# Altium PCB Nokia LCD.PcbDoc
Units mm, origin at the board's own origin, x right, y up, seen from the top; angles counter-clockwise.
Board outline 37.97 x 55.88 mm, 2 copper layers (Top Layer, Bottom Layer); 2 components, 7 nets, 19 pads, 0 vias.
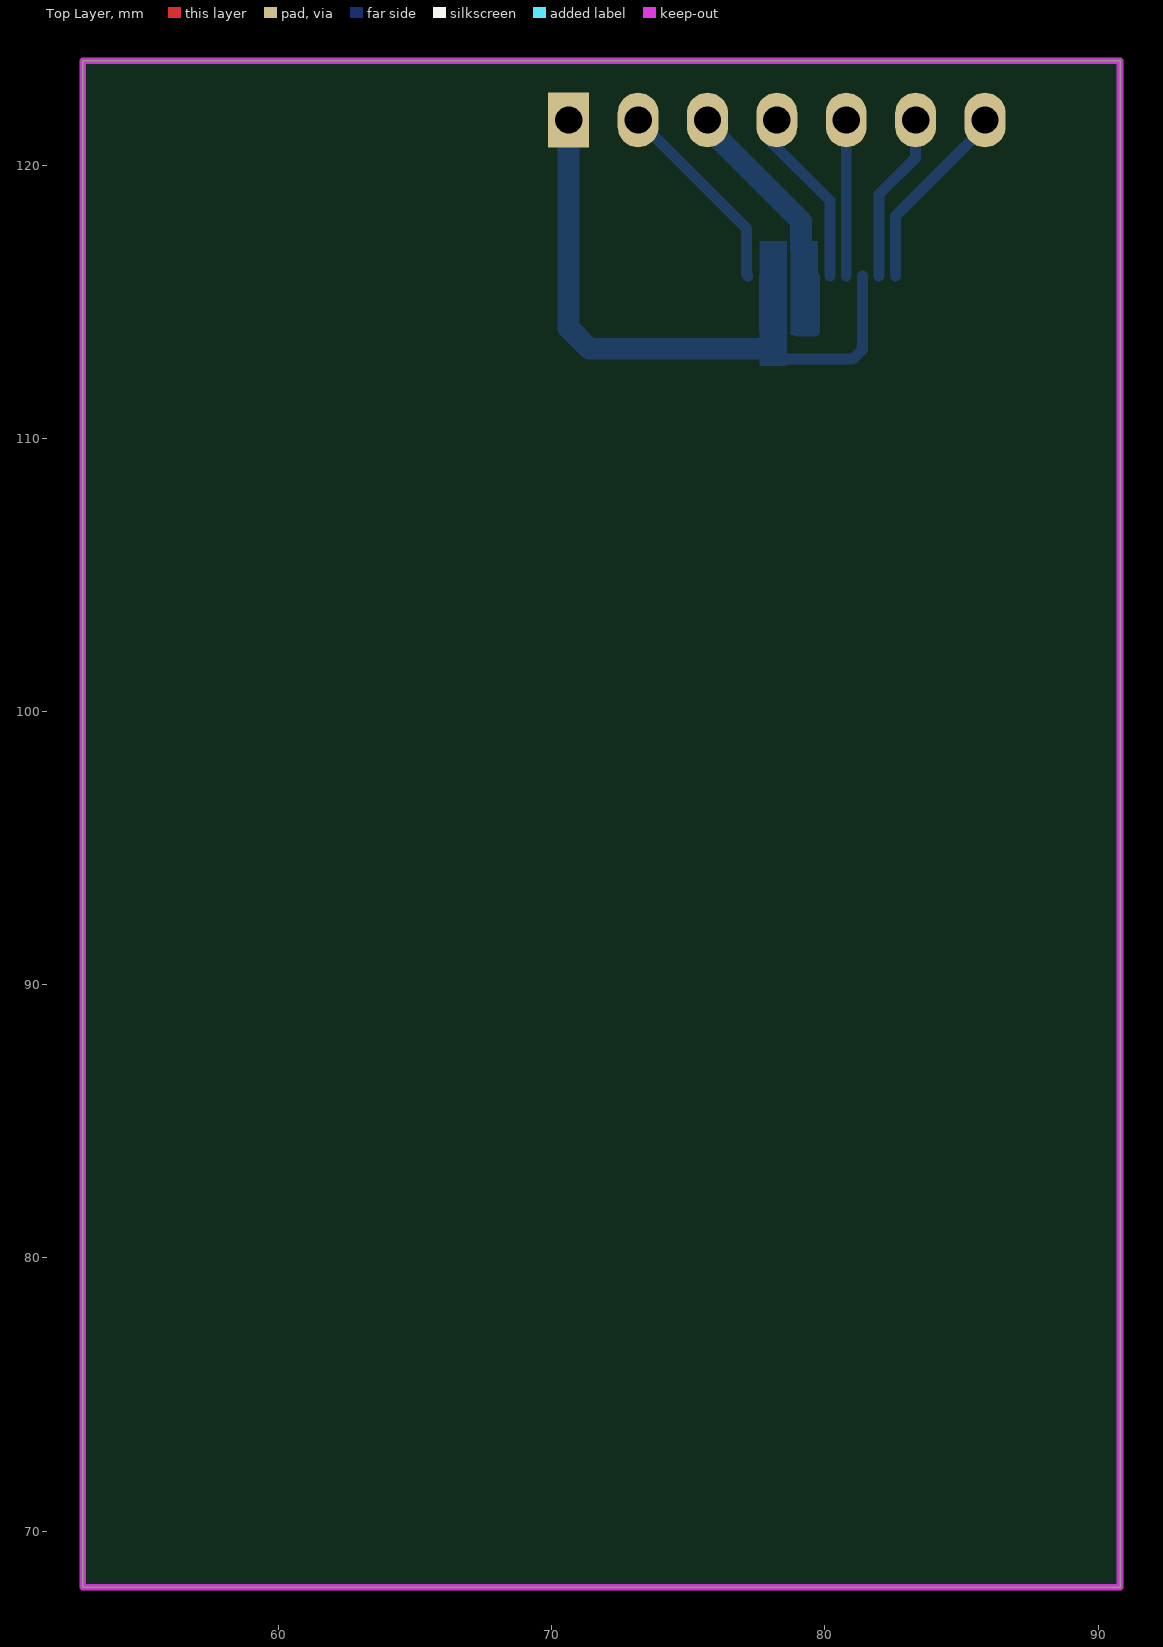
[diagram p0: Top Layer view]
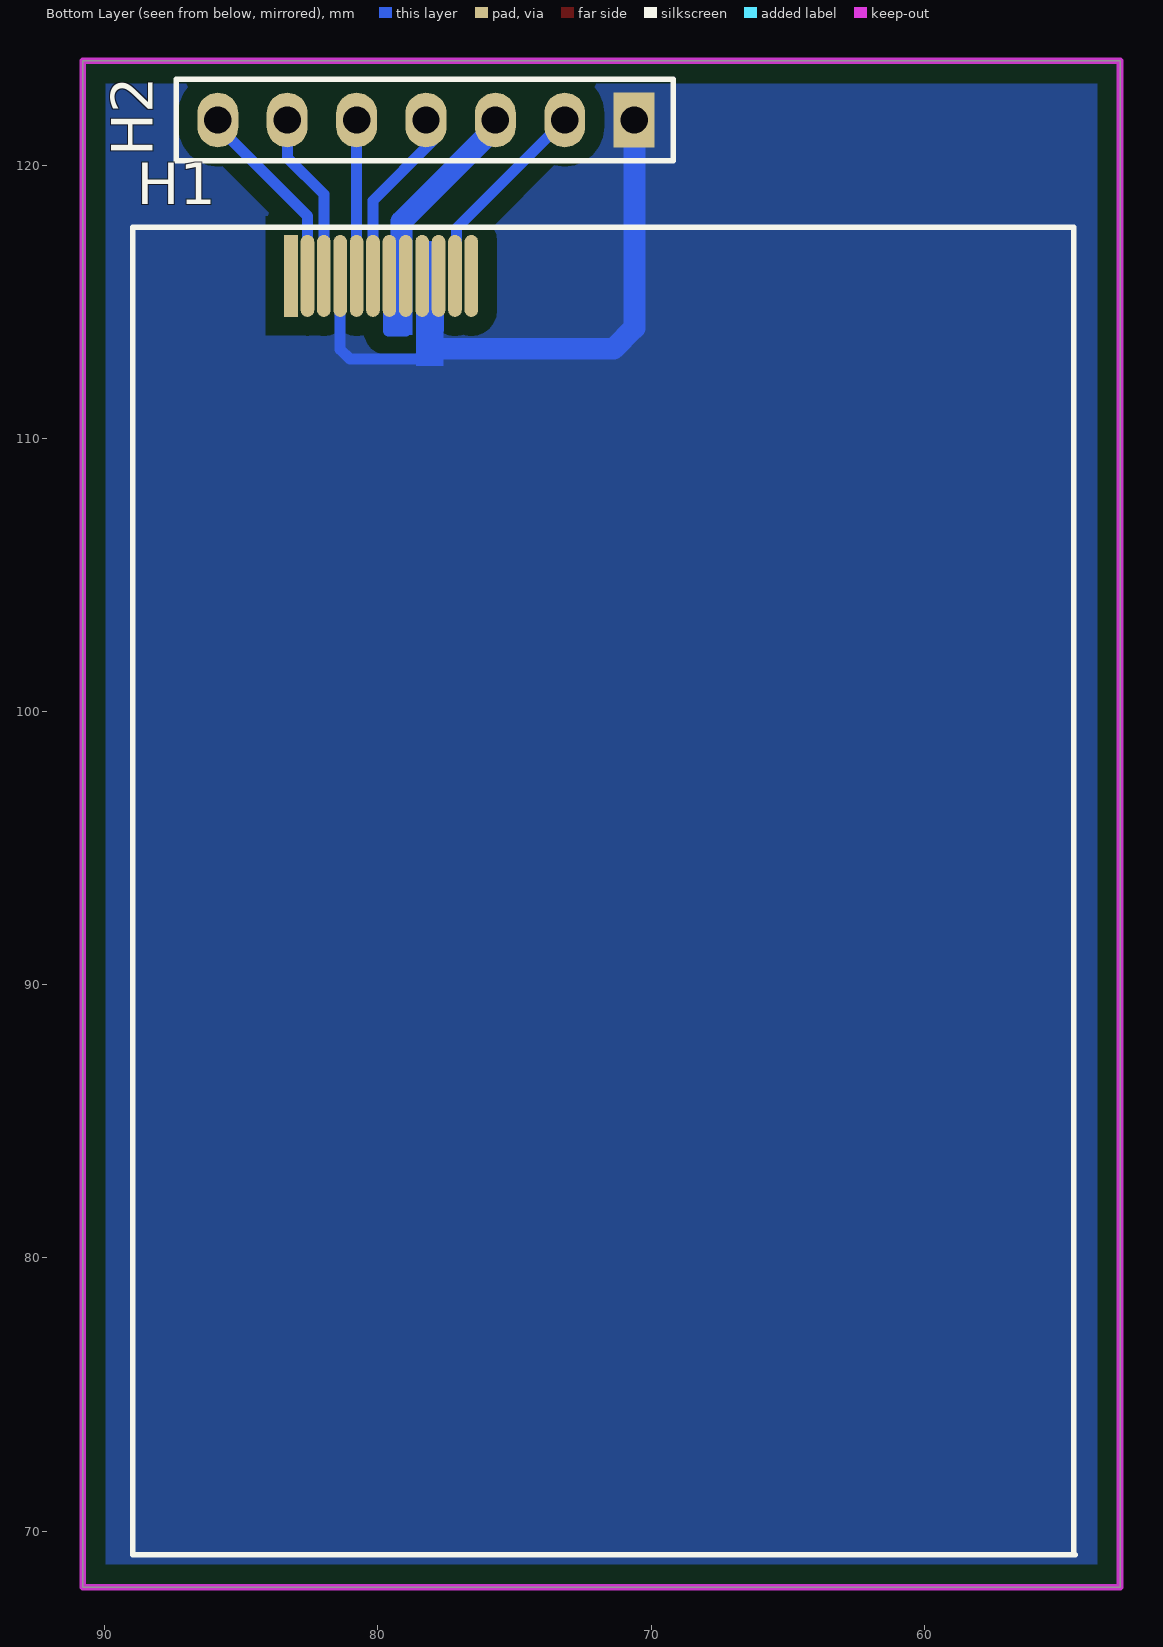
[diagram p1: Bottom Layer view, seen from below]

## Layer stack, top to bottom
Top Solder: solder mask 0.0102, Solder Resist, Dk 3.5
Top Layer: signal copper 0.0356
Dielectric 1: dielectric 0.32, FR-4, Dk 4.8
Bottom Layer: signal copper 0.0356
Bottom Solder: solder mask 0.0102, Solder Resist, Dk 3.5

## Board outline
52.832,67.945 52.832,123.825 90.805,123.825 90.805,67.945

## Design rules (kind name [scope] priority, off if disabled: settings)
Clearance [All] p1: gap=0.1 except(0.7: Arc-Poly Track-Poly SMDPad-Poly THPad-Poly Via-Poly Fill-Poly Poly-Poly)
PolygonConnect [All] p1: connectstyle=Direct reliefconductorwidth=0.254 reliefentries=4 polygonreliefangle="90 Angle" airgapwidth=0.254
RoutingVias [All] p1: holewidth=0.711 width=1.27 viastyle="Through Hole" minholewidth=0.711 minwidth=1.27 maxholewidth=0.711 maxwidth=1.27
SolderMaskExpansion [All] p1: expansion=0.102
Width [All] p1: maxlimit=10 minlimit=0.254 preferedwidth=0.4
30 further rules are at their usual default settings.

## Components (designator, comment, footprint, x,y, rotation, side; value= is the part's Value field where it differs from the comment)
H1 "LCD Header 12*1" "LCD Header - duplicate" 54.479,117.729 r90 bottom
H2 "HEDER 7PIN" "HEADER 7X1" 78.241,121.657 r0 bottom

## Footprints (in the part's own frame and the unit in brackets; to place one, negate y for a bottom-side part, rotate by r counter-clockwise, add the part's x,y. Pads: shape width x height; smd on the part's side, far side on the other; paste and mask are expansions set on the pad)
"HEADER 7X1" [mm]
  rect 1.5x2 hole 1: 1(-7.62,0)
  oval 1.5x2 hole 1: 2(-5.08,0) 3(-2.54,0) 4(0,0) 5(2.54,0) 6(5.08,0) 7(7.62,0)
  silkscreen extent -9.05,-1.5 9.14,1.5, body extent -8.81,-1.27 8.92,1.32, height 8.38
"LCD Header - duplicate" [mm]
  rect 3x0.5 smd: 1(-1.778,28.702)
  oval 3x0.5 smd: 2(-1.778,28.102) 3(-1.778,27.502) 4(-1.778,26.902) 5(-1.778,26.302) 6(-1.778,25.702) 7(-1.778,25.102) 8(-1.778,24.502) 9(-1.778,23.902) 10(-1.778,23.302) 11(-1.778,22.702) 12(-1.778,22.102)
  silkscreen extent -48.6,0 0,34.5

## Nets (pads, with @x,y where several pads share a name; then routed paths per layer and width w, separated by ;. In a path a pad name is that pad's centre, name@x,y a point inside that pad or via, vN(x,y) a via of type N, cw(c..) or ccw(c..) an arc to the next point about the centre after c; other vN are vias at no path point)
3V3: H1.7 H1.8 H2.3 | length 11.3
  Bottom Layer w0.4: H1.8 78.981,113.932 79.616,113.932 79.616,115.916 H1.7
  Bottom Layer w0.8: H2.3@75.438,121.92 75.438,121.644 79.131,117.951 79.131,116.957 79.248,116.84
BACKLIGHT: H1.11 H2.2 | length 7.7
  Bottom Layer w0.4: H2.2@72.898,121.92 H2.2 77.131,117.687 77.131,116.001 H1.11
CS: H1.3 H2.6 | length 6.6
  Bottom Layer w0.4: H1.3 81.981,118.938 83.312,120.269 83.312,121.666 H2.6@83.058,121.92
GND: H1.4 H1.9 H1.10 H2.1 | length 26.6
  Bottom Layer w0.4: 77.781,113.976 H1.10 ; H1.9 78.381,113.008 78.486,112.903 81.026,112.903 81.381,113.258 H1.4
  Bottom Layer w0.8: H2.1@70.358,121.92 70.612,121.666 70.612,114.046 71.374,113.284 78.105,113.284
RESET: H1.2 H2.7 | length 7.2
  Bottom Layer w0.4: H1.2 82.581,118.141 85.598,121.158 H2.7@85.598,121.92
SCL: H1.6 H2.4 | length 6.9
  Bottom Layer w0.4: H2.4@77.978,121.92 77.978,120.904 80.181,118.701 H1.6
SDA: H1.5 H2.5 | length 6.1
  Bottom Layer w0.4: H2.5@80.518,121.92 H2.5 H1.5
pads on no net: H1.1 H1.12

## Polygon pours and split planes (outlines as drawn)
GND on Keep-Out Layer "Mechanical 1-No Net" (solid, remove dead copper): 90.805,123.825 52.832,123.825 52.832,67.945 90.805,67.945 90.805,123.825
GND on Bottom Layer "Mechanical 1-No Net" (solid, remove dead copper, pour order 0): 90.805,123.825 52.832,123.825 52.832,67.945 90.805,67.945 90.805,123.825

## Keep-outs
Keep-Out Layer:
  lines w0.254: 52.832,67.945 52.832,123.825 90.805,123.825 90.805,67.945 54.737,67.945 52.832,67.945

## Other copper
Bottom Layer:
  rectangle net GND: 77.597,112.649 78.613,117.221
  rectangle net 3V3: 78.74,113.792 79.756,117.221